# EAGLE board Final_bk (EAGLE 7.1.0)

Size 144.45 x 39.36 mm. Coordinates in mm from the lower left corner, seen from the top.
Outline: 0,0 144.45,0 144.45,39.36 0,39.36 0,0
Copper layers (1*16): Top 0.035mm / dielectric 1.5mm / Bottom 0.035mm
Design rules "default": minimum track width 10mil, minimum drill 24mil, track to track 8mil, track to pad 8mil, pad to pad 8mil, via to via 8mil, smd to smd 8mil, copper to edge 40mil, drill to drill 8mil, minimum pad ring 10mil, minimum via ring 8mil, stop-mask expansion 4mil, vias tented up to drill 0mil, thermal gap 10mil

## Footprints (pad centres in the part's own frame; a part is rotated, then mirrored left to right if it is on the bottom)
JST-PH-2-SMT-RA = smd 1 x 4.6: 1 1,-3.7; 2 -1,-3.7 | smd 1.6 x 3.4: NC1 -3.4,1.5; NC2 3.4,1.5
E7,5-16 = drill 1.016 pad 3.15: + -3.81,0 | drill 1.016 pad 3.15 octagon: - 3.81,0
E2,5-5 = drill 0.813 pad 1.6: + -1.27,0 | drill 0.813 pad 1.6 octagon: - 1.27,0
LED5MM = drill 0.813 pad 1.676 octagon: A -1.27,0; K 1.27,0
DIODE-1N4001 = drill 1 pad 1.981: A -5.08,0; C 5.08,0
QFN20 = smd 0.75 x 0.3: 1 -2,1; 2 -2,0.5; 3 -2,0; 4 -2,-0.5; 5 -2,-1; 11 2,-1; 12 2,-0.5; 13 2,0; 14 2,0.5; 15 2,1 | smd 0.3 x 0.75: 6 -1,-2; 7 -0.5,-2; 8 0,-2; 9 0.5,-2; 10 1,-2; 16 1,2; 17 0.5,2; 18 0,2; 19 -0.5,2; 20 -1,2 | smd 2.286 x 2.286: GND3 0,0
POWER_JACK_PTH = drill 2.997 pad 4.318: GND 0,7.7; GNDBREAK 4.7,10.7; PWR 0,13.7
0207/10 = drill 0.813 pad 1.676 octagon: 1 -5.08,0; 2 5.08,0
SOT23-6 = smd 1.2 x 0.55: 1 -1.3,0.95; 2 -1.3,0; 3 -1.3,-0.95; 4 1.3,-0.95; 5 1.3,0; 6 1.3,0.95
SON50P300X300X100-11N = smd 0.813 x 0.305: 1 -1.473,0.991; 2 -1.473,0.508; 3 -1.473,0; 4 -1.473,-0.508; 5 -1.473,-0.991; 6 1.473,-0.991; 7 1.473,-0.508; 8 1.473,0; 9 1.473,0.508; 10 1.473,0.991 | smd 1.651 x 2.388: 11 0,0
SOP65P640X120-17N = smd 1.473 x 0.356: 1 -2.921,2.286; 2 -2.921,1.626; 3 -2.921,0.965; 4 -2.921,0.33; 5 -2.921,-0.33; 6 -2.921,-0.965; 7 -2.921,-1.626; 8 -2.921,-2.286; 9 2.921,-2.286; 10 2.921,-1.626; 11 2.921,-0.965; 12 2.921,-0.33; 13 2.921,0.33; 14 2.921,0.965; 15 2.921,1.626; 16 2.921,2.286 | smd 2.997 x 2.997: 17 0,0
USB-AB-MICRO-SMD_V03 = smd 1.4 x 0.4: D+1 2.7,0; D-1 2.7,0.65; GND1 2.7,-1.3; ID1 2.7,-0.65; VBUS1 2.7,1.3 | hole 0.85: 2.2,1.9; 2.2,-1.9
USB-A-S-NOSILK-FEMALE = smd 3 x 0.9: D+ 4.212,-1; D- 4.212,1; GND 4.212,-3.5; VBUS 4.212,3.5 | drill 2.311: S1 0,-6.566; S2 0,6.566

## Placement (x,y rotation side)
BATT  [JST-PH-2-SMT-RA]  3.81,34.29 90 top
C1  4700 uF  [E7,5-16]  21.59,8.89 180 top
C2  10 uF  [E2,5-5]  3.81,13.97 180 top
C3  10 uF  [E2,5-5]  17.78,29.21 0 top
C4  10 uF  [E2,5-5]  17.78,35.56 0 top
CHRG  [LED5MM]  26.67,27.94 270 top
D1  [DIODE-1N4001]  8.89,7.62 270 top
DONE  [LED5MM]  26.67,20.32 270 top
FRAME1  FRAME-LETTER  [CREATIVE_COMMONS]  -78.74,25.4 0 top  (outside the outline)
IC1  MCP73871  [QFN20]  17.78,21.59 90 top
J1  POWER_JACKPTH  [POWER_JACK_PTH]  -1.27,22.86 270 top
PWR  [LED5MM]  26.67,35.56 270 top
R1  [0207/10]  36.83,36.83 0 top
R2  [0207/10]  36.83,33.02 0 top
R3  [0207/10]  36.83,29.21 0 top
R4  270 kOhm  [0207/10]  36.83,25.4 0 top
R5  100 kOhm  [0207/10]  36.83,21.59 0 top
R6  1 kOhm  [0207/10]  36.83,13.97 0 top
R7  100 kOhm  [0207/10]  36.83,10.16 0 top
R9  1 kOhm  [0207/10]  36.83,6.35 0 top
R10  150 kOhm  [0207/10]  36.83,2.54 0 top
THERM  10 kOhm  [0207/10]  36.83,17.78 0 top
TPS2513  TPS2513  [SOT23-6]  87.63,46.99 0 top  (outside the outline)
U1  TPS2561DRCT  [SON50P300X300X100-11N]  88.9,40.64 0 top
U2  TPS61030PWPR  [SOP65P640X120-17N]  63.5,31.75 0 top
U3  [USB-AB-MICRO-SMD_V03]  2.54,6.35 0 top
U$1  USB+SHIELDUSB-A-S-NOSILK-FEMALE  [USB-A-S-NOSILK-FEMALE]  88.9,10.16 180 top

## Library data of the parts
BATT C1-C4 CHRG DONE IC1 PWR R1-R7 R9 R10 THERM = adafruit
D1 = SparkFun-DiscreteSemi
FRAME1 = SparkFun-Aesthetics
J1 = SparkFun-Connectors; PROD_ID: PRT-00119
TPS2513 = TPS2513
U1 = Texas Instruments_By_element14_Batch_1; MPN: TPS2561DRCT; OC_FARNELL: 1815767; OC_NEWARK: 60R2438; PACKAGE: SON-10; SUPPLIER: Texas Instruments
U2 = TPS61230; MPN: TPS61030PWPR; OC_FARNELL: -; OC_NEWARK: 32H6564; PACKAGE: HTSSOP-16; SUPPLIER: TEXAS INSTRUMENTS
U3 = SparkFun-Connectors; PROD_ID: CONN-11794
U$1 = SparkFun-Connectors

## Nets
EN: U2.9
GND: C1.- C2.- C3.- C4.- IC1.10 IC1.11 IC1.GND3 J1.GNDBREAK R5.1 R6.1 R7.1 R10.2 THERM.2 U3.GND1
IN: U1.3
IN_2: U1.2
N$1: D1.A J1.PWR
N$2: IC1.2 R4.1 R5.2
N$3: BATT.1 C4.+ IC1.14 IC1.15 IC1.16
N$4: IC1.12 R7.2
N$5: CHRG.A R1.1
N$6: DONE.A R2.1
N$7: PWR.A R3.1
N$8: IC1.6 PWR.K
N$9: C2.+ D1.C U3.VBUS1
N$10: CHRG.K IC1.8
N$11: IC1.13 R6.2
N$12: IC1.5 R9.1
N$13: R9.2 R10.1 THERM.1
N$14: BATT.2 J1.GND
N$16: C3.+ IC1.1 IC1.20
VBAT: U2.6
VCC: C1.+ IC1.3 IC1.4 IC1.9 IC1.17 IC1.18 IC1.19 R1.2 R2.2 R3.2 R4.2

## Tracks (layer width: path | path; a pad name or v marks a point on that pad's centre or on a via)
GND  (13 unrouted)
N$1  (1 unrouted)
N$2  (2 unrouted)
N$3  (4 unrouted)
N$4  (1 unrouted)
N$5  (1 unrouted)
N$6  (1 unrouted)
N$7  (1 unrouted)
N$8  (1 unrouted)
N$9  (2 unrouted)
N$10  (1 unrouted)
N$11  (1 unrouted)
N$12  (1 unrouted)
N$13  (2 unrouted)
N$14  (1 unrouted)
N$16  (2 unrouted)
VCC  (10 unrouted)